# Altium PCB ПечатнаяПлата.PcbDoc
Units mm, origin at the board's own origin, x right, y up, seen from the top; angles counter-clockwise.
Board outline 100 x 80 mm, 2 copper layers (Top Layer, Bottom Layer); 87 components, 101 nets, 406 pads, 98 vias.
Unrouted connection lines stored in the file: 1.
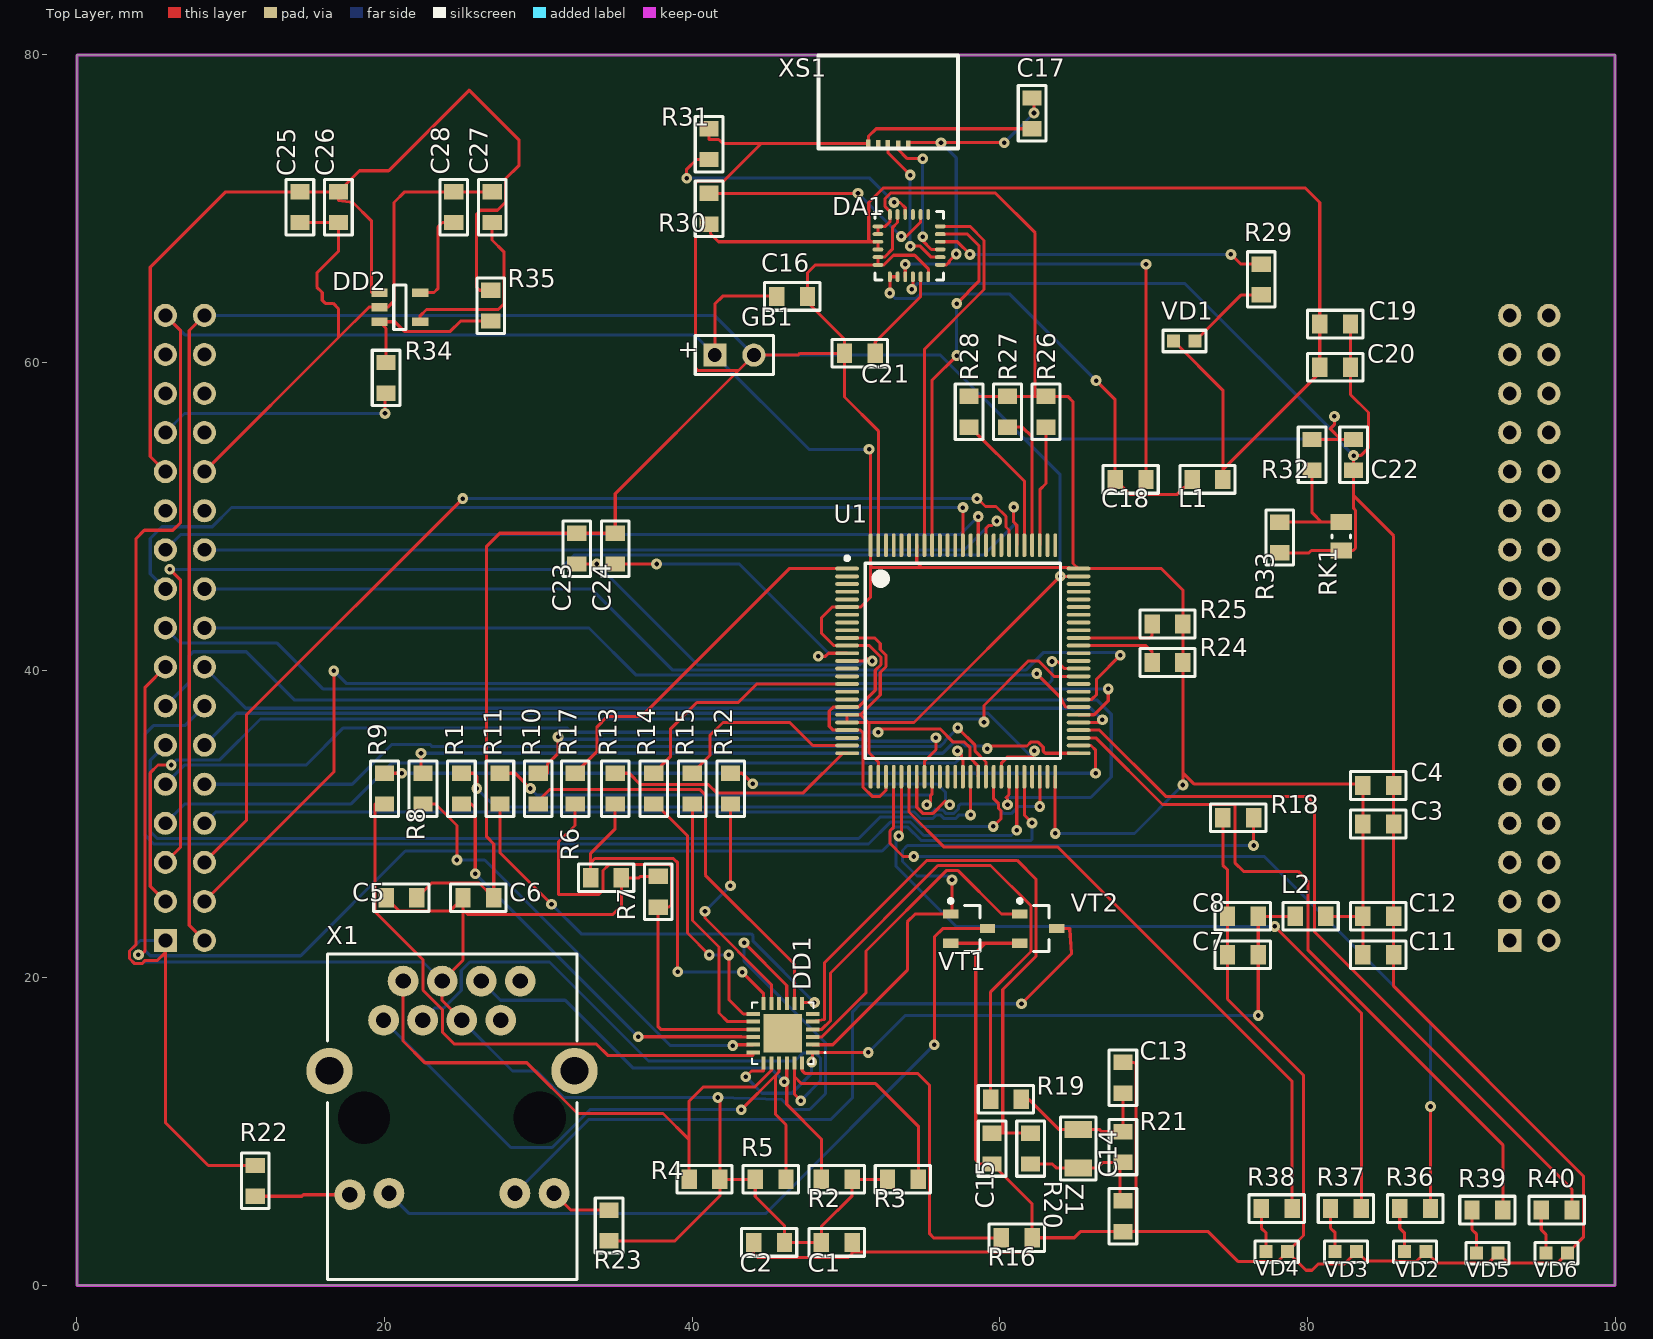
[diagram p0: Top Layer view]
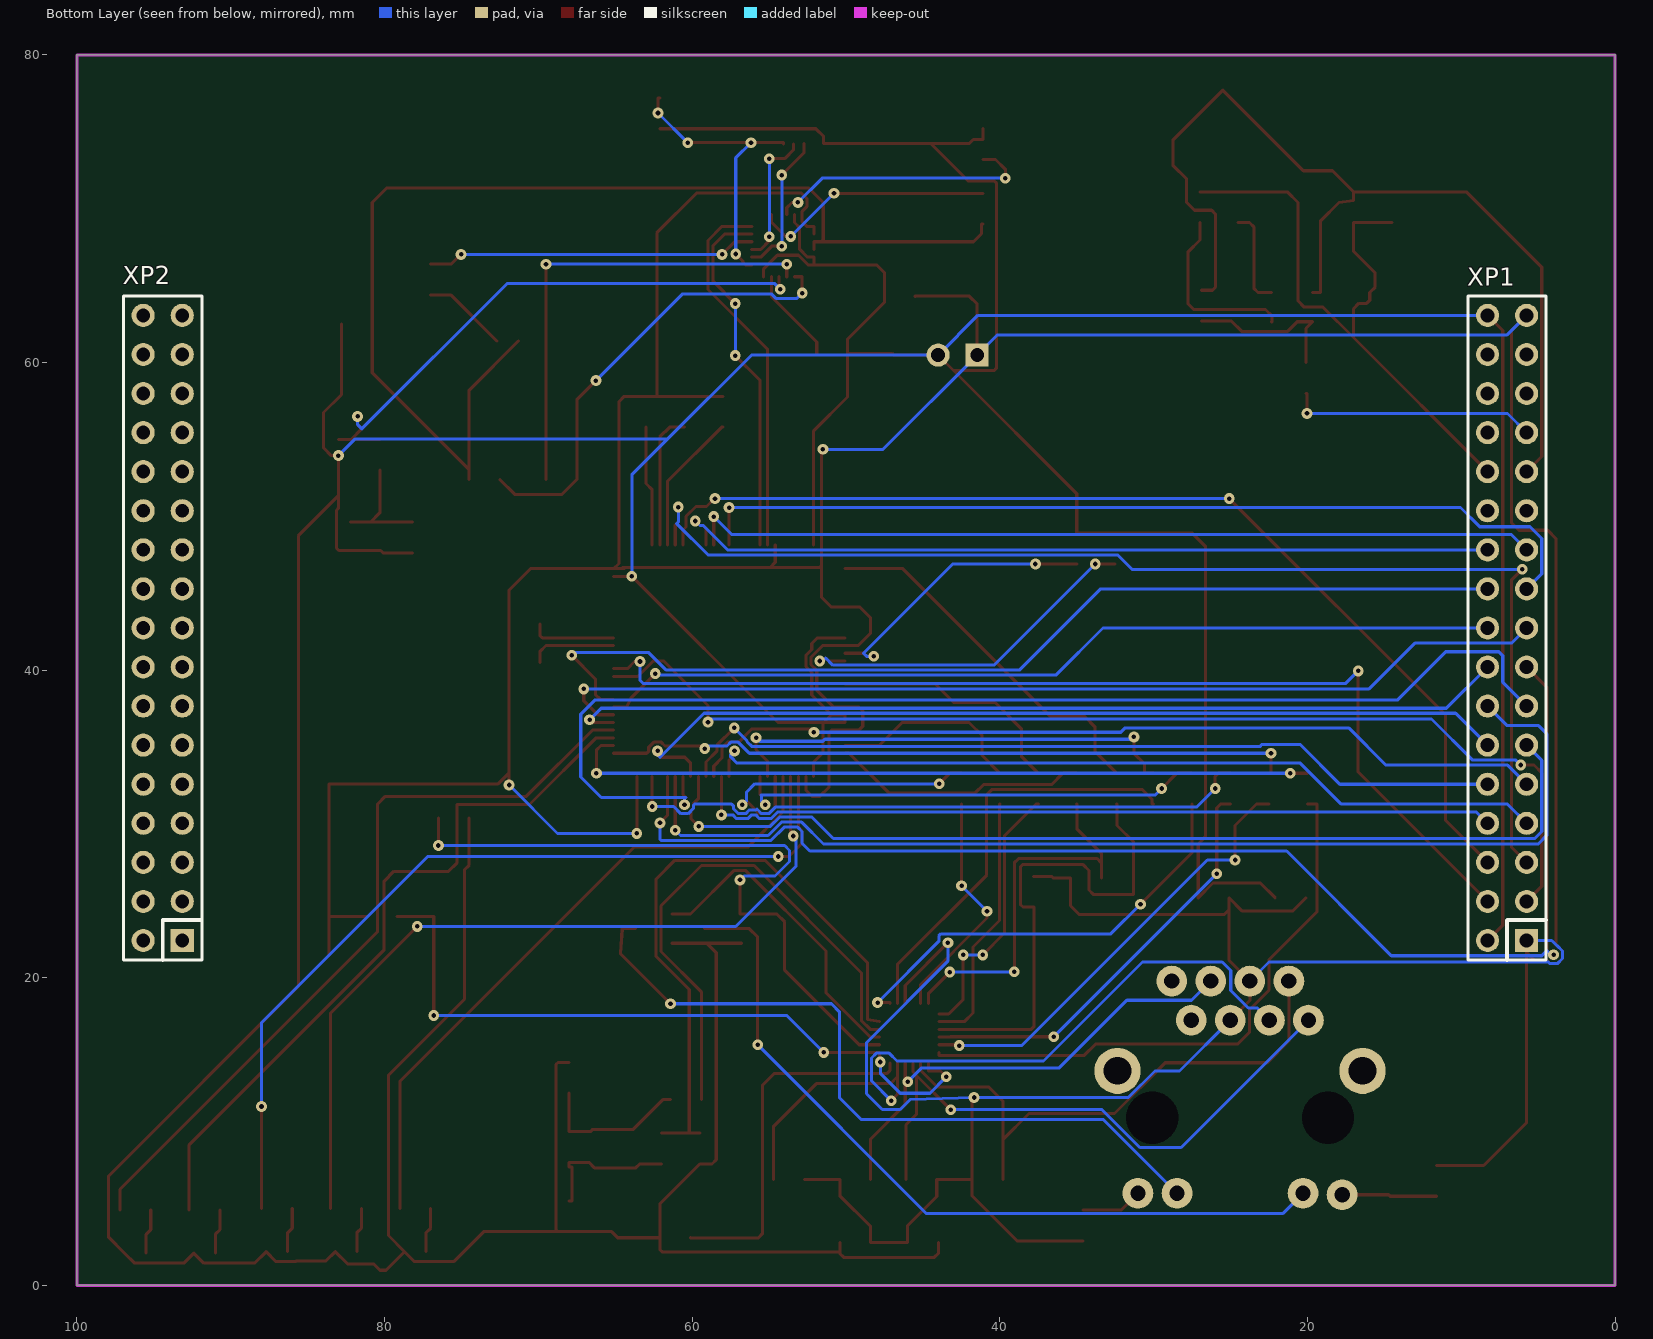
[diagram p1: Bottom Layer view, seen from below]

## Layer stack, top to bottom
Top Solder: solder mask 0.0102, Solder Resist, Dk 3.5
Top Layer: signal copper 0.0356
Dielectric 1: dielectric 0.32, FR-4, Dk 4.8
Bottom Layer: signal copper 0.0356
Bottom Solder: solder mask 0.0102, Solder Resist, Dk 3.5

## Board outline
0,0 100,0 100,80 0,80

## Design rules (kind name [scope] priority, off if disabled: settings)
Clearance [All] p1: gap=0.125
PolygonConnect [All] p1: connectstyle=Relief reliefconductorwidth=0.254 reliefentries=4 polygonreliefangle="90 Angle" airgapwidth=0.254
RoomDefinition Shcematic [InComponentClass('Shcematic')] p1: confinementstyle=ConfineIn formatcopy=TRUE lockcomponents=FALSE outline -72.5,-82.5 -21.7,-82.5 -21.7,-57.1 -72.5,-57.1
RoutingVias [All] p1: holewidth=0.3 width=0.7 viastyle="Through Hole" minholewidth=0.3 minwidth=0.6 maxholewidth=0.6 maxwidth=1.2
SolderMaskExpansion [All] p1: expansion=0.102
Width [All] p1: maxlimit=10 minlimit=0.125 preferedwidth=0.2
29 further rules are at their usual default settings.

## Components (designator, comment, footprint, x,y, rotation, side; value= is the part's Value field where it differs from the comment)
C1 "100 nF" CH0805C 49.4,2.8 r0 top
C2 "100 nF" CH0805C 45,2.8 r180 top
C3 "100 nF" CH0805C 84.6,30 r0 top
C4 "10 uF" CH0805C 84.6,32.5 r0 top
C5 "100 nF" CH0805C 21.1,25.2 r0 top
C6 "100 nF" CH0805C 26.1,25.2 r0 top
C7 "100 nF" CH0805C 75.8,21.5 r180 top
C8 "10 uF" CH0805C 75.8,24 r180 top
C11 "100 nF" CH0805C 84.6,21.5 r0 top
C12 "10 uF" CH0805C 84.6,24 r0 top
C13 "20 pF" CH0805C 68,13.5 r90 top
C14 "20 pF" CH0805C 68,4.5 r270 top
C15 "10 pF" CH0805C 59.5,8.9 r270 top
C16 "*" CH0805C 46.5,64.3 r0 top
C17 "*" CH0805C 62.1,76.2 r90 top
C18 "*" CH0805C 68.5,52.4 r0 top
C19 "*" CH0805C 81.8,62.5 r0 top
C20 "*" CH0805C 81.8,59.7 r0 top
C21 "*" CH0805C 50.9,60.6 r180 top
C22 "*" CH0805C 83,54 r270 top
C23 "" CH0805C 32.5,47.9 r90 top
C24 "" CH0805C 35,47.9 r90 top
C25 "*" CH0805C 14.5,70.1 r270 top
C26 "*" CH0805C 17,70.1 r270 top
C27 "*" CH0805C 27,70.1 r90 top
C28 "*" CH0805C 24.5,70.1 r90 top
DA1 "BQ24295" BQ24295 54.1,67.6 r180 top
DD1 "LAN8720" "*QFN50P400X400X100-25N - duplicate" 45.9,16.4 r180 top
DD2 "CAT6219" CAT6219 21,63.6 r0 top
GB1 "Battery" Battery 38.2,61.3 r0 top
L1 "Inductor" CH0805L 73.5,52.4 r0 top
L2 "190 mH" CH0805L 80.2,24 r180 top
R1 "22" CH0805R 25,32.3 r270 top
R2 "49.9" CH0805R 49.4,6.9 r0 top
R3 "49.9" CH0805R 53.7,6.9 r180 top
R4 "49.9" CH0805R 40.8,6.9 r0 top
R5 "49.9" CH0805R 45.1,6.9 r180 top
R6 "1.5 k" CH0805R 34.4,26.5 r0 top
R7 "10 k" CH0805R 37.8,25.6 r90 top
R8 "22" CH0805R 22.5,32.3 r270 top
R9 "22" CH0805R 20,32.3 r270 top
R10 "22" CH0805R 30,32.3 r270 top
R11 "22" CH0805R 27.5,32.3 r270 top
R12 "22" CH0805R 42.5,32.3 r270 top
R13 "22" CH0805R 35,32.3 r270 top
R14 "22" CH0805R 37.5,32.3 r270 top
R15 "22" CH0805R 40,32.3 r270 top
R16 "12.1 k" CH0805R 61.1,3.1 r180 top
R17 "22" CH0805R 32.4,32.3 r270 top
R18 "10 k" CH0805R 75.5,30.4 r0 top
R19 "22" CH0805R 60.4,12.1 r0 top
R20 "22" CH0805R 62,8.9 r90 top
R21 "1 M" CH0805R 68,9 r270 top
R22 "680" CH0805R 11.6,6.8 r90 top
R23 "680" CH0805R 34.6,3.9 r270 top
R24 "" CH0805R 70.9,40.5 r0 top
R25 "" CH0805R 70.9,43 r0 top
R26 "" CH0805R 63,56.8 r90 top
R27 "" CH0805R 60.5,56.8 r90 top
R28 "" CH0805R 58,56.8 r90 top
R29 "*" CH0805R 77,65.4 r270 top
R30 "*" CH0805R 41.1,70 r90 top
R31 "*" CH0805R 41.1,74.2 r270 top
R32 "*" CH0805R 80.3,54 r90 top
R33 "*" CH0805R 78.2,48.625 r90 top
R34 "*" CH0805R 20.1,59 r90 top
R35 "*" CH0805R 26.9,63.7 r270 top
R36 "65" CH0805R 87,5 r180 top
R37 "65" CH0805R 82.5,5 r180 top
R38 "65" CH0805R 78,5 r180 top
R39 "65" CH0805R 91.7,4.9 r180 top
R40 "65" CH0805R 96.2,4.9 r180 top
RK1 "Resistor_termo" "0805 (Resistor)" 82.2,48.7 r90 top
U1 "STM32F407VGT6" STM-LQFP100_L 57.6,40.6 r0 top
VD1 "*" CH0603LB 72,61.4 r180 top
VD2 "*" CH0603LB 87,2.2 r0 top
VD3 "*" CH0603LB 82.5,2.2 r0 top
VD4 "*" CH0603LB 78,2.2 r0 top
VD5 "*" CH0603LB 91.7,2.1 r0 top
VD6 "*" CH0603LB 96.2,2.1 r0 top
VT1 "*" SOT23_123 58,23.2 r0 top
VT2 "*" SOT23_123 62.5,23.2 r0 top
X1 "HR911105A" "CON: HR911105A" 30.1,10.9 r180 top
XP1 "Коннектор" Connector 12,42 r180 bottom
XP2 "Comment" Connector 99.4,42 r180 bottom
XS1 "USB" USB 42.5,72.3 r90 top
Z1 "25MHz" "OSC: 3215" 65.1,8.9 r270 top

## Footprints (in the part's own frame and the unit in brackets; to place one, negate y for a bottom-side part, rotate by r counter-clockwise, add the part's x,y. Pads: shape width x height; smd on the part's side, far side on the other; paste and mask are expansions set on the pad)
"0805 (Resistor)" [mm] "Chip Resistor, 2-Leads, Body 2,10x1,30mm, IPC Medium Density"
  rect 1.05x1.4 smd: 1(-0.925,0) 2(0.925,0)
  silkscreen extent -0.1,-0.6 0.1,0.6, body extent -0.97,-0.63 1.02,0.63, height 0.5
"*QFN50P400X400X100-25N - duplicate" [mm]
  rect 0.86x0.26 smd: 1(-1.935,1.25) 2(-1.935,0.75) 3(-1.935,0.25) 4(-1.935,-0.25) 5(-1.935,-0.75) 6(-1.935,-1.25) 13(1.935,-1.25) 14(1.935,-0.75) 15(1.935,-0.25) 16(1.935,0.25) 17(1.935,0.75) 18(1.935,1.25)
  rect 0.26x0.86 smd: 7(-1.25,-1.935) 8(-0.75,-1.935) 9(-0.25,-1.935) 10(0.25,-1.935) 11(0.75,-1.935) 12(1.25,-1.935) 19(1.25,1.935) 20(0.75,1.935) 21(0.25,1.935) 22(-0.25,1.935) 23(-0.75,1.935) 24(-1.25,1.935)
  rect 2.5x2.5 smd: 25(0,0)
  silkscreen extent -2.8,-2 2,2, body extent -2,-2 2,2, height 1.01
Battery [mm]
  rect 1.5x1.5 hole 0.9: 1(3.27,-0.818)
  round 1.5 hole 0.9: 2(5.81,-0.818)
  silkscreen extent 2,-2.09 7.08,0.45, body extent 2,-8.17 7.08,0.45, height 5.85
BQ24295 [mm] "QFN, 24-Leads, Body 4,00x4,00mm, Pitch 0,50mm, Thermal Pad 3,00x3,00mm, IPC Medium Density"
  oval 0.7x0.25 smd: 1(-2.025,1.25) 2(-2.025,0.75) 3(-2.025,0.25) 4(-2.025,-0.25) 5(-2.025,-0.75) 6(-2.025,-1.25) 13(2.025,-1.25) 14(2.025,-0.75) 15(2.025,-0.25) 16(2.025,0.25) 17(2.025,0.75) 18(2.025,1.25)
  oval 0.25x0.7 smd: 7(-1.25,-2.025) 8(-0.75,-2.025) 9(-0.25,-2.025) 10(0.25,-2.025) 11(0.75,-2.025) 12(1.25,-2.025) 19(1.25,2.025) 20(0.75,2.025) 21(0.25,2.025) 22(-0.25,2.025) 23(-0.75,2.025) 24(-1.25,2.025)
  silkscreen extent -2.23,-2.22 2.22,2.22, body extent -2.05,-2.05 2.05,2.05, height 1
CAT6219 [mm] "SOT23, 5-Leads, Body 2,90x2,80mm, Pitch 0,95mm, IPC Medium Density"
  rect 1.05x0.55 smd: 1(-1.325,0.95) 2(-1.325,0) 3(-1.325,-0.95) 4(1.325,-0.95) 5(1.325,0.95)
  silkscreen extent -0.4,-1.45 0.4,1.45, body extent -1.5,-1.5 1.5,1.5, height 1.3
CH0603LB [mm] "Chip Capacitor, 2-Leads, Body 1,53x0,85mm, IPC Medium Density"
  rect 0.85x0.85 smd: 1(-0.7,0) 2(0.7,0)
  silkscreen extent -1.4,-0.7 1.4,0.7, body extent -0.8,-0.4 0.8,0.4, height 0.6
CH0805C [mm] "Chip Capacitor, 2-Leads, Body 2,00x1,20mm, IPC Medium Density"
  rect 1x1.25 smd: 1(-1,0) 2(1,0)
  silkscreen extent -1.8,-0.9 1.8,0.9, body extent -1,-0.62 1,0.63, height 0.78
CH0805L [mm]
  rect 1x1.25 smd: 1(-1,0) 2(1,0)
  silkscreen extent -1.8,-0.9 1.8,0.9, body extent -1,-0.62 1,0.63, height 0.85
CH0805R [mm]
  rect 1x1.25 smd: 1(-1,0) 2(1,0)
  silkscreen extent -1.8,-0.9 1.8,0.9, body extent -1,-0.6 1,0.6, height 0.44
"CON: HR911105A" [mm]
  round 3 hole 1.8: 0(-2.25,-3.05) 0(13.68,-3.05)
  oval 0.7x0 hole 3.4: 0(0,0) 0(11.43,0)
  round 2 hole 1: 1(10.165,-6.35) 2(8.895,-8.89) 3(7.625,-6.35) 4(6.355,-8.89) 5(5.085,-6.35) 6(3.815,-8.89) 7(2.545,-6.35) 8(1.275,-8.89) 9(12.35,5) 10(9.81,4.9) 11(1.62,4.9) 12(-0.92,4.9)
  round 0.5 on Mech1: ""(13.1,-10)
  silkscreen extent -2.4,-10.65 13.8,10.5, body extent -2.24,-10.5 13.64,10.9, height 13.6
Connector [mm]
  rect 1.5x1.5 hole 0.9: 1(6.25,-19.575)
  round 1.5 hole 0.9: 2(3.71,-19.575) 3(6.25,-17.035) 4(3.71,-17.035) 5(6.25,-14.495) 6(3.71,-14.495) 7(6.25,-11.955) 8(3.71,-11.955) 9(6.25,-9.415) 10(3.71,-9.415) 11(6.25,-6.875) 12(3.71,-6.875) 13(6.25,-4.335) 14(3.71,-4.335) 15(6.25,-1.795) 16(3.71,-1.795) 17(6.25,0.745) 18(3.71,0.745) 19(6.25,3.285) 20(3.71,3.285) 21(6.25,5.825) 22(3.71,5.825) 23(6.25,8.365) 24(3.71,8.365) 25(6.25,10.905) 26(3.71,10.905) 27(6.25,13.445) 28(3.71,13.445) 29(6.25,15.985) 30(3.71,15.985) 31(6.25,18.525) 32(3.71,18.525) 33(6.25,21.065) 34(3.71,21.065)
  silkscreen extent 2.44,-20.85 7.52,22.33, body extent 2.48,-20.85 7.48,22.33, height 8.4
"OSC: 3215" [mm]
  rect 1.1x1.8 smd: 1(-1.25,0) 3(1.25,0)
  silkscreen extent -2.05,-1.15 2.05,1.15, body extent -1.61,-0.76 1.61,0.76, height 0.91
SOT23_123 [mm] "SOT23, 3-Leads, Body 3,0x2,6mm (max), Pitch 0,95mm, IPC Medium Density"
  rect 1x0.6 smd: 1(-1.2,0.95) 2(1.2,0) 3(-1.2,-0.95)
  round 0.5 on Mech1: ""(-0.9,1.1)
  silkscreen extent -1.32,-1.5 0.7,1.92, body extent -1.32,-1.52 1.32,1.52, height 1.12
STM-LQFP100_L [mm] "Thin QFP, 100-Leads, Body 14x14mm, Pitch 0.5mm, IPC High Density"
  oval 1.55x0.25 smd: 1(-7.525,6) 2(-7.525,5.5) 3(-7.525,5) 4(-7.525,4.5) 5(-7.525,4) 6(-7.525,3.5) 7(-7.525,3) 8(-7.525,2.5) 9(-7.525,2) 10(-7.525,1.5) 11(-7.525,1) 12(-7.525,0.5) 13(-7.525,0) 14(-7.525,-0.5) 15(-7.525,-1) 16(-7.525,-1.5) 17(-7.525,-2) 18(-7.525,-2.5) 19(-7.525,-3) 20(-7.525,-3.5) 21(-7.525,-4) 22(-7.525,-4.5) 23(-7.525,-5) 24(-7.525,-5.5) 25(-7.525,-6) 51(7.525,-6) 52(7.525,-5.5) 53(7.525,-5) 54(7.525,-4.5) 55(7.525,-4) 56(7.525,-3.5) 57(7.525,-3) 58(7.525,-2.5) 59(7.525,-2) 60(7.525,-1.5) 61(7.525,-1) 62(7.525,-0.5) 63(7.525,0) 64(7.525,0.5) 65(7.525,1) 66(7.525,1.5) 67(7.525,2) 68(7.525,2.5) 69(7.525,3) 70(7.525,3.5) 71(7.525,4) 72(7.525,4.5) 73(7.525,5) 74(7.525,5.5) 75(7.525,6)
  oval 0.25x1.55 smd: 26(-6,-7.525) 27(-5.5,-7.525) 28(-5,-7.525) 29(-4.5,-7.525) 30(-4,-7.525) 31(-3.5,-7.525) 32(-3,-7.525) 33(-2.5,-7.525) 34(-2,-7.525) 35(-1.5,-7.525) 36(-1,-7.525) 37(-0.5,-7.525) 38(0,-7.525) 39(0.5,-7.525) 40(1,-7.525) 41(1.5,-7.525) 42(2,-7.525) 43(2.5,-7.525) 44(3,-7.525) 45(3.5,-7.525) 46(4,-7.525) 47(4.5,-7.525) 48(5,-7.525) 49(5.5,-7.525) 50(6,-7.525) 76(6,7.525) 77(5.5,7.525) 78(5,7.525) 79(4.5,7.525) 80(4,7.525) 81(3.5,7.525) 82(3,7.525) 83(2.5,7.525) 84(2,7.525) 85(1.5,7.525) 86(1,7.525) 87(0.5,7.525) 88(0,7.525) 89(-0.5,7.525) 90(-1,7.525) 91(-1.5,7.525) 92(-2,7.525) 93(-2.5,7.525) 94(-3,7.525) 95(-3.5,7.525) 96(-4,7.525) 97(-4.5,7.525) 98(-5,7.525) 99(-5.5,7.525) 100(-6,7.525)
  silkscreen extent -7.65,-6.35 6.35,6.8, body extent -7,-7 7,7, height 1.6
USB [mm]
  rect 0.5x0.3 smd: 1(1.9,-11.55) 2(1.9,-10.9) 3(1.925,-10.225) 4(1.925,-9.6) 5(1.95,-8.95)
  silkscreen extent 1.62,-14.78 7.65,-5.7, body extent 1.75,-14.65 7.48,-5.85, height 2.71

## Part data
C1 C2 C3 C4 C5 C6 C7 C8 C11 C12 C13 C14 C15 C16 C17 C18 C19 C20 C21 C22 C23 C24 C25 C26 C27 C28: library part Capacitor
DA1: "PWR"
L2: library part Inductor
R1 R2 R3 R4 R5 R6 R7 R8 R9 R10 R11 R12 R13 R14 R15 R16 R17 R18 R19 R20 R21 R22 R23 R24 R25 R26 R27 R28 R29 R30 R31 R32 R33 R34 R35 R36 R37 R38 R39 R40: library part Resistor
U1: "ARM Cortex-M4 32-bit MCU+FPU, 210 DMIPS, 1024 kB Flash, 192 kB Internal RAM, 82 I/Os, 100-pin LQFP, -40 to 85 degC, Tray"
VD1 VD2 VD3 VD4 VD5 VD6: library part LED
VT1 VT2: library part N-chanel, "Mosfet"
X1: "Ethernet RJ-45"
XP1: library part Connector
Z1: library part Oscillator

## Via types
v1: diameter 0.7, hole 0.3, Top Layer to Bottom Layer, 98 vias

## Nets (pads, with @x,y where several pads share a name; then routed paths per layer and width w, separated by ;. In a path a pad name is that pad's centre, name@x,y a point inside that pad or via, vN(x,y) a via of type N, cw(c..) or ccw(c..) an arc to the next point about the centre after c; other vN are vias at no path point)
+3V3: C1.1 C2.1 C3.1 C4.1 C5.1 C6.1 C11.1 C12.1 C16.1 DA1.12 DA1.13 DA1.14 DD1.9 GB1.1 L2.1 R2.2 R3.2 R4.2 R5.2 R6.2 R7.2 R22.2 R23.2 R24.2 R25.2 R26.2 R27.2 R28.2 U1.6 U1.11 U1.19 U1.22 U1.28 U1.50 U1.75 U1.94 U1.100 X1.4 X1.5 XP1.1 XP1.33 | length 403.4
  Top Layer w0.2: XP1.1 5.75,21.64 ; XP1.33 6.748,62.067 6.748,49.605 6.24,49.097 4.386,49.097 3.852,48.564 3.852,22.166 3.425,21.738 3.425,21.262 3.762,20.925 4.238,20.925 4.445,21.132 5.242,21.132 5.75,21.64 ; R22.2 8.548,7.8 5.75,10.598 5.75,21.64 ; C5.1 20.968,24.332 24.232,24.332 C6.1 25.1,24.434 ; X1.5 23.745,18.52 X1.4 25.1,21.145 25.1,24.434 ; R23.2 38.884,2.9 41.8,5.816 R4.2 ; R7.2 36.642,26.6 36.542,26.5 R6.2 35.4,24.688 34.816,24.104 25.43,24.104 25.1,24.434 ; GB1.1 41.47,63.804 41.978,64.312 45.5,64.312 C16.1 ; v1(41.673,12.217) 41.8,12.09 R4.2 ; v1(43.375,22.275) 46.15,19.5 DD1.9 ; v1(51.503,54.355) 51.6,54.258 U1.100 51.6,46.786 ; DA1.14 DA1.13 52.562,68.85 52.85,69.138 DA1.12 52.85,69.826 52.545,70.131 52.545,70.662 52.891,71.008 59.716,71.008 62.298,68.427 62.298,57.8 ; U1.28 52.6,32.186 52.214,31.8 51.706,31.8 51.096,32.41 51.096,35.948 50.944,36.1 U1.22 49.166,36.1 48.912,36.354 48.912,37.346 49.166,37.6 U1.19 50.8,37.6 51.9,38.7 51.9,39.987 52.275,40.362 52.275,40.838 51.513,41.6 U1.11 49.199,41.6 48.404,42.395 48.404,43.411 49.093,44.1 U1.6 50.944,44.1 51.6,44.756 51.6,46.786 ; R3.2 R2.2 50.4,5.835 48.4,3.835 C1.1 C2.1 46,3.885 44.1,5.785 R5.2 R4.2 ; U1.94 54.6,47.008 54.929,46.679 ; R28.2 R27.2 62.298,57.8 ; v1(63.6,29.387) U1.50 ; v1(71.9,32.536) 71.9,33.324 ; L2.1 C12.1 ; C11.1 C12.1 ; 51.6,46.786 51.707,46.679 54.929,46.679 ; 54.929,46.679 64.371,46.679 ; 62.298,57.8 R26.2 64.416,57.8 64.762,57.454 64.762,46.93 U1.75@65.092,46.6 ; 64.371,46.679 64.515,46.679 U1.75@64.515,46.6 ; 64.371,46.679 64.45,46.6 U1.75@64.515,46.6 ; U1.75@64.515,46.6 U1.75@65.092,46.6 ; U1.75@65.092,46.6 U1.75 70.511,46.6 71.9,45.211 R25.2 R24.2 71.9,33.324 ; 71.9,33.324 72.611,32.613 83.6,32.613 C4.1 C3.1 C12.1
  Bottom Layer w0.2: XP1.1 4.129,22.425 3.779,22.075 3.762,22.075 3.425,21.738 3.425,21.262 3.762,20.925 4.238,20.925 4.344,21.03 22.505,21.03 X1.4 ; XP1.33 7.018,61.797 40.155,61.797 GB1.1 47.597,54.355 v1(51.503,54.355) ; X1.5 28.321,13.944 29.917,13.944 31.644,12.217 v1(41.673,12.217) 45.832,12.09 46.483,11.438 47.64,11.438 48.669,12.468 48.669,15.787 43.375,21.081 v1(43.375,22.275) ; v1(63.6,29.387) 68.751,29.387 v1(71.9,32.536)
BLCNT: R34.1 XP1.27 | length 16.2
  Top Layer w0.2: v1(20.032,56.692) 20.032,58 R34.1
  Bottom Layer w0.2: XP1.27 6.997,56.692 v1(20.032,56.692)
BLGND: C25.2 C26.2 C27.2 C28.2 DD2.2 XP1.26 | length 41.4
  Top Layer w0.2: XP1.26 17.01,61.625 ; C25.2 C26.2 17.01,69.1 17.01,67.231 15.6,65.822 15.6,64.903 15.952,64.551 15.952,64.048 16.154,63.846 16.657,63.846 17.01,63.493 17.01,61.625 ; C27.2 C28.2 21.308,71.1 20.616,70.408 20.616,64.006 20.21,63.6 DD2.2 18.985,63.6 17.01,61.625
BLVDD: C25.1 C26.1 DD2.1 R35.1 XP1.25 | length 64.6
  Top Layer w0.2: XP1.25 4.767,53.888 4.767,66.198 9.669,71.1 C25.1 C26.1 ; DD2.1 19.14,64.55 19.14,69.217 17.949,70.408 17,70.535 C26.1 ; R35.1 26.179,64.7 25.976,64.903 25.976,69.646 26.23,69.9 27.347,69.9 27.855,70.408 27.855,71.932 28.75,72.827 28.75,74.45 25.5,77.7 20.265,72.465 18.378,72.465 17.012,71.1 C26.1
GND: C1.2 C2.2 C3.2 C4.2 C5.2 C6.2 C7.2 C8.2 C11.2 C12.2 C13.2 C14.2 C15.2 C16.2 C17.1 C19.2 C20.2 C21.2 C22.2 C23.2 C24.2 DA1.11 DA1.17 DA1.18 DA1.24 DD1.25 GB1.2 R16.1 R18.1 R31.1 R33.1 RK1.1 U1.10 U1.20 U1.21 U1.27 U1.74 U1.99 VD2.2 VD3.2 VD4.2 VD5.2 VD6.2 VT1.3 VT2.3 XP1.2 XP1.34 XS1.5 | length 503.4
  Top Layer w0.2: XP1.2 7.307,23.408 7.307,62.082 XP1.34 ; C5.2 23.061,26.161 26.139,26.161 C6.2 27.1,28.701 26.636,29.165 26.636,48.056 27.48,48.9 C23.2 C24.2 35,51.472 43.014,59.486 ; R31.1 41.089,75.2 41.089,74.497 41.724,74.497 41.978,74.243 44.492,74.243 ; C2.2 44,2.082 44.254,1.828 50.146,1.828 50.4,2.082 C1.2@50.4,2.184 ; U1.10 51.857,42.1 52.225,41.732 52.225,41.348 52.6,40.973 52.6,40.227 52.225,39.852 52.225,38.381 50.948,37.104 ; C1.2 C1.2@50.4,2.184 ; U1.27 52.1,34.035 51.487,34.648 51.487,36.565 51.453,36.6 ; U1.99 52.1,55.559 49.9,57.759 C21.2 ; DA1.11 53.35,69.108 53.011,68.768 53.011,67.36 52.501,66.85 DA1.17 DA1.18 ; DA1.24 55.35,66.09 54.465,66.975 53.093,66.975 52.468,66.35 DA1.18 ; VT1.3 59.047,22.25 ; VT2.3 59.047,22.25 ; C17.1 51.96,75.2 51.45,74.69 XS1.5 51.45,74.243 44.492,74.243 ; C13.2 68.724,14.5 68.851,14.373 68.851,3.627 68.724,3.5 ; R18.1 74.5,27.325 74.8,27.025 C8.2 C7.2 74.8,18.612 79.748,13.664 79.748,3.248 VD4.2 ; R33.1 80.103,47.625 80.253,47.775 RK1.1 82.972,47.775 83.126,47.929 83.126,50.393 82.999,50.52 82.999,51.333 ; C19.2 C20.2 82.8,57.911 83.964,56.747 83.964,54.457 83.456,53.949 v1(82.999,53.949) ; C22.2 82.999,51.333 ; v1(82.999,53.949) v1(82.999,53.949) ; C22.2 v1(82.999,53.949) ; 43.014,59.486 40.361,59.486 40.225,59.622 40.225,71.678 40.352,71.805 42.054,71.805 44.492,74.243 ; 43.014,59.486 GB1.2 46.88,60.482 46.998,60.6 C21.2 ; C21.2 49.9,61.518 47.5,63.918 C16.2 47.5,65.836 48.014,66.35 DA1.18 ; U1.20 50.948,37.104 ; U1.20 50.944,37.1 50.948,37.104 ; U1.20 U1.21 51.453,36.6 ; C1.2@50.4,2.184 61.948,2.184 62.1,2.336 R16.1 ; 50.948,37.104 51.453,36.6 ; 51.453,36.6 54.423,36.6 v1(63.923,46.1) ; 59.047,22.25 58.434,21.64 58.434,8.178 58.712,7.9 C15.2 62.1,5.3 R16.1 ; R16.1 64.838,3.1 65.238,3.5 C14.2 68.724,3.5 ; v1(63.923,46.1) U1.74 v1(63.923,46.1) ; 68.724,3.5 73.554,3.5 75.506,1.549 78.049,1.549 VD4.2 ; VD4.2 79.91,0.99 80.29,0.99 80.7,1.4 82.4,1.4 VD3.2 83.8,1.6 85.732,1.6 85.782,1.55 87.05,1.55 VD2.2 88.453,1.447 91.747,1.447 VD5.2 93.053,1.447 96.247,1.447 VD6.2 97.934,3.134 97.934,7.122 85.6,19.456 C11.2 C12.2 85.6,26.999 C3.2 C4.2 85.6,48.731 82.999,51.333
  Bottom Layer w0.2: XP1.34 41.427,63.065 GB1.2 56.146,60.482 61.612,55.016 ; v1(63.923,46.1) 63.923,52.704 61.612,55.016 ; v1(82.999,53.949) 81.932,55.016 61.612,55.016
NetC7_1: C7.1 C8.1 DD1.1 DD1.19 L2.2 | length 47.3
  Top Layer w0.2: v1(43.476,13.563) 43.857,13.944 44.65,13.944 DD1.19 ; v1(47.769,14.528) 47.835,14.594 DD1.1 v1(51.452,15.15) ; v1(76.8,17.551) C7.1 C8.1 L2.2
  Bottom Layer w0.2: v1(43.476,13.563) 44.543,12.496 46.474,12.496 47.769,13.791 v1(47.769,14.528) ; v1(51.452,15.15) 53.853,17.551 v1(76.8,17.551)
NetC13_1: C13.1 R19.2 R21.1 Z1.1 | length 10
  Top Layer w0.2: R19.2 61.872,12.1 63.822,10.15 Z1.1 66.463,10.15 66.613,10 R21.1 C13.1
NetC14_1: C14.1 R20.1 R21.2 Z1.3 | length 9.1
  Top Layer w0.2: R20.1 63.415,7.9 63.666,7.65 Z1.3 66.362,7.65 66.712,8 R21.2 68,7.69 67.8,7.69 67.8,5.5 C14.1
NetC15_1: C15.1 DD1.5 R20.2 | length 41.4
  Top Layer w0.2: DD1.5 48.591,17.305 48.591,20.963 55.262,27.634 61.129,27.634 62.35,26.414 62.35,21.4 60.19,19.24 60.19,9.9 ; C15.1 60.19,9.9 ; R20.2 60.19,9.9
NetC17_2: C17.2 DA1.1 XS1.1 | length 19.2
  Top Layer w0.2: XS1.1 54.05,74.294 v1(56.176,74.294) v1(60.291,74.294) ; DA1.1 56.532,66.35 56.71,66.528 56.71,66.598 v1(57.167,67.055) ; C17.2 62.222,77.2 v1(62.222,76.225)
  Bottom Layer w0.2: v1(56.176,74.294) 57.167,73.304 v1(57.167,67.055) ; v1(60.291,74.294) v1(62.222,76.225)
NetC18_1: C18.1 DA1.19 DA1.20 L1.1 | length 30.3
  Top Layer w0.2: v1(52.85,64.514) DA1.19 DA1.20 ; v1(66.26,58.826) 67.5,57.586 C18.1 68.466,51.434 71.534,51.434 L1.1
  Bottom Layer w0.2: v1(52.85,64.514) 53.189,64.175 54.561,64.175 54.85,64.464 60.621,64.464 v1(66.26,58.826)
NetC18_2: C18.2 DA1.21 | length 30.5
  Top Layer w0.2: DA1.21 v1(53.85,66.395) ; C18.2 v1(69.5,66.395)
  Bottom Layer w0.2: v1(53.85,66.395) v1(69.5,66.395)
NetC19_1: C19.1 C20.1 DA1.15 DA1.16 L1.2 R30.1 VD1.2 | length 75.3
  Top Layer w0.2: R30.1 41.19,69 41.19,68.376 41.716,67.85 51.622,67.85 ; DA1.16 DA1.15 51.622,67.85 ; VD1.2 74.5,58.2 74.5,53.034 ; L1.2 74.5,53.034 ; 51.622,67.85 51.477,67.995 51.477,70.408 52.419,71.35 79.858,71.35 80.8,70.408 C19.1 C20.1 80.8,59.334 74.5,53.034
NetC21_1: C21.1 DA1.23 | length 6.2
  Top Layer w0.2: C21.1 51.9,61.338 54.85,64.288 DA1.23
NetC22_1: C22.1 DA1.22 R32.2 | length 37.6
  Top Layer w0.2: v1(54.271,64.769) 54.35,64.848 DA1.22 ; R32.2 82.161,55 ; v1(81.75,56.5) 81.75,55.961 81.475,55.686 82.161,55 ; C22.1 82.161,55
  Bottom Layer w0.2: v1(54.271,64.769) 54.627,65.125 72.036,65.125 81.475,55.686 81.75,55.961 v1(81.75,56.5)
NetC23_1: C23.1 U1.13 | length 24
  Top Layer w0.2: C23.1 v1(33.799,46.9) ; U1.13 51.133,40.6 51.325,40.792 51.517,40.6 v1(51.7,40.6)
  Bottom Layer w0.2: v1(33.799,46.9) 40.374,40.325 50.858,40.325 51.325,40.792 51.517,40.6 v1(51.7,40.6)
NetC24_1: C24.1 U1.12 | length 19
  Top Layer w0.2: C24.1 v1(37.685,46.9) ; v1(48.2,40.9) 48.661,40.9 48.861,41.1 U1.12
  Bottom Layer w0.2: v1(37.685,46.9) 43.061,46.9 48.861,41.1 48.661,40.9 v1(48.2,40.9)
NetC27_1: C27.1 DD2.4 | length 11.8
  Top Layer w0.2: DD2.4 22.318,62.65 22.318,63.042 22.725,63.448 27.398,63.448 27.754,63.804 27.754,67.208 26.992,67.97 26.992,69.1 C27.1
NetC28_1: C28.1 DD2.5 | length 6.4
  Top Layer w0.2: DD2.5 23.217,64.55 23.487,64.82 23.487,68.821 23.766,69.1 C28.1
NetDA1_2: DA1.2 XS1.3 | length 9.5
  Top Layer w0.2: XS1.3 52.725,73.631 v1(54.17,72.186) ; v1(54.17,67.563) 54.83,67.563 55.543,66.85 DA1.2
  Bottom Layer w0.2: v1(54.17,67.563) v1(54.17,72.186)
NetDA1_3: DA1.3 XS1.2 | length 8.9
  Top Layer w0.2: XS1.2 53.4,73.845 53.992,73.253 v1(54.983,73.253) ; v1(54.983,68.173) 54.983,67.919 55.551,67.35 DA1.3
  Bottom Layer w0.2: v1(54.983,68.173) v1(54.983,73.253)
NetDA1_4: DA1.4 R29.1 | length 21.5
  Top Layer w0.2: DA1.4 57.236,67.85 v1(58.056,67.03) ; v1(75.023,67.03) 75.653,66.4 R29.1
  Bottom Layer w0.2: v1(58.056,67.03) v1(75.023,67.03)
NetDA1_8: DA1.8 R30.2 | length 15.8
  Top Layer w0.2: R30.2 v1(50.784,71) ; v1(53.586,68.198) 53.916,68.198 54.85,69.132 DA1.8
  Bottom Layer w0.2: v1(50.784,71) v1(53.586,68.198)
NetDA1_10: DA1.10 R31.2 | length 17.7
  Top Layer w0.2: v1(39.641,71.983) 39.641,72.565 40.276,73.2 R31.2 ; v1(53.128,70.408) 53.509,70.408 53.85,70.067 DA1.10
  Bottom Layer w0.2: v1(39.641,71.983) 51.554,71.983 v1(53.128,70.408)
NetDD1_2: DD1.2 R18.2 VT1.1 | length 45.8
  Top Layer w0.2: DD1.2 49.141,15.65 53.992,20.501 53.992,23.642 54.5,24.15 VT1.1 56.888,24.15 v1(56.888,26.364) ; v1(76.5,28.6) R18.2
  Bottom Layer w0.2: v1(56.888,26.364) 56.634,26.618 54.62,26.618 53.671,27.567 53.671,28.279 53.992,28.6 v1(76.5,28.6)
NetDD1_3: DD1.3 VT2.1 | length 20.7
  Top Layer w0.2: DD1.3 48.429,16.15 51.3,19.02 51.3,21.746 56.517,26.964 57.294,26.964 60.108,24.15 VT2.1
NetDD1_4: DD1.4 R19.1 | length 35.2
  Top Layer w0.2: DD1.4 48.432,16.65 48.988,17.206 48.988,20.319 55.973,27.304 59.396,27.304 62.025,24.675 62.025,21.716 59.4,19.091 R19.1
NetDD1_7: DD1.7 R11.2 | length 28.7
  Top Layer w0.2: R11.2 27.5,28.142 v1(30.853,24.79) ; DD1.7 47.15,18.389 v1(47.947,18.389)
  Bottom Layer w0.2: v1(30.853,24.79) 32.783,22.859 43.832,22.859 43.963,22.728 43.963,22.373 v1(47.947,18.389)
NetDD1_8: DD1.8 R10.2 | length 27.5
  Top Layer w0.2: R10.2 30.116,31.3 30.116,31.622 30.726,32.232 40.53,32.232 40.86,31.902 40.86,26.674 46.65,20.885 DD1.8
NetDD1_11: DD1.11 R12.2 | length 15.5
  Top Layer w0.2: v1(40.835,24.332) 40.835,23.885 45.15,19.57 DD1.11 ; v1(42.486,25.983) 42.486,31.3 R12.2
  Bottom Layer w0.2: v1(40.835,24.332) v1(42.486,25.983)
NetDD1_12: DD1.12 R6.1 R13.2 | length 25.3
  Top Layer w0.2: R6.1 33.4,27.489 ; R13.2 34.993,31.3 34.993,29.684 33.4,28.092 33.4,27.489 ; v1(39.057,20.395) 39.057,27.482 38.777,27.761 33.672,27.761 33.4,27.489 ; v1(43.248,20.37) 44.65,18.968 DD1.12
  Bottom Layer w0.2: v1(39.057,20.395) 39.082,20.37 v1(43.248,20.37)
NetDD1_13: DD1.13 R14.2 | length 17.5
  Top Layer w0.2: R14.2 37.634,31.3 39.692,29.243 39.692,22.91 v1(41.114,21.488) ; v1(42.384,21.488) 42.384,18.59 43.324,17.65 DD1.13
  Bottom Layer w0.2: v1(41.114,21.488) v1(42.384,21.488)
NetDD1_14: DD1.14 R15.2 | length 16.8
  Top Layer w0.2: R15.2 40.022,31.3 40.022,23.723 41.743,22.001 41.743,17.715 42.308,17.15 DD1.14
NetDD1_15: DD1.15 R7.1 R17.2 | length 32.7
  Top Layer w0.2: R17.2 32.377,31.3 32.377,29.901 31.3,28.824 31.3,25.425 33.926,25.425 34.205,25.704 34.205,26.974 34.586,27.355 38.523,27.355 38.65,27.228 38.65,24.752 38.498,24.6 R7.1 37.787,24.6 37.787,16.814 37.951,16.65 DD1.15
NetDD1_16: DD1.16 R1.2 | length 27.7
  Top Layer w0.2: R1.2 25.638,31.3 25.9,31.038 v1(25.9,26.771) ; v1(36.501,16.17) 43.213,16.17 43.233,16.15 DD1.16
  Bottom Layer w0.2: v1(25.9,26.771) v1(36.501,16.17)
NetDD1_17: DD1.17 R8.2 | length 29.3
  Top Layer w0.2: R8.2 23.309,31.3 24.706,29.903 v1(24.706,27.66) ; v1(42.638,15.595) 42.693,15.65 DD1.17
  Bottom Layer w0.2: v1(24.706,27.66) 26.509,27.66 38.574,15.595 v1(42.638,15.595)
NetDD1_18: DD1.18 R9.2 | length 38.3
  Top Layer w0.2: R9.2 19.372,31.3 19.372,24.307 22.496,21.183 22.496,19.202 23.766,17.932 23.766,16.458 24.528,15.696 33.774,15.696 34.51,14.96 43.959,14.96 43.959,15.15 DD1.18
NetDD1_20: DD1.20 R4.1 X1.2 | length 36.9
  Top Layer w0.2: X1.2 21.205,15.895 22.623,14.477 29.245,14.477 32.547,11.175 38.098,11.175 39.8,9.473 ; R4.1 39.8,9.473 ; DD1.20 45.15,13.98 44.072,12.902 40.714,12.902 39.8,11.988 39.8,9.473
NetDD1_21: DD1.21 R5.1 X1.1 | length 38.8
  Top Layer w0.2: v1(43.19,11.429) 45.416,13.655 ; DD1.21 45.65,13.889 45.416,13.655 ; R5.1 46.1,10.439 45.416,11.123 45.416,13.655
  Bottom Layer w0.2: X1.1 28.21,8.975 30.897,8.975 33.352,11.429 v1(43.19,11.429)
NetDD1_22: DD1.22 R2.1 X1.6 | length 31.1
  Top Layer w0.2: v1(45.991,13.239) v1@46.15,13.398 ; DD1.22 v1@46.15,13.398 ; R2.1 48.4,9.521 46.15,11.771 v1@46.15,13.398
  Bottom Layer w0.2: X1.6 27.534,18.541 31.742,18.541 36.132,14.151 45.079,14.151 v1(45.991,13.239)
NetDD1_23: DD1.23 R3.1 X1.3 | length 50
  Top Layer w0.2: DD1.23 46.65,13.582 ; v1(47.058,12.013) 46.65,12.421 46.65,13.582 ; R3.1 54.7,10.351 51.931,13.12 47.112,13.12 46.65,13.582
  Bottom Layer w0.2: X1.3 23.258,18.033 23.842,18.033 24.985,19.176 24.985,20.472 25.544,21.03 30.726,21.03 37.161,14.595 46.686,14.595 47.194,15.103 48.023,15.103 48.344,14.782 48.344,13.3 v1(47.058,12.013)
NetDD1_24: DD1.24 R16.2 | length 23.6
  Top Layer w0.2: DD1.24 47.15,13.969 47.328,13.791 54.652,13.791 55.44,13.004 55.44,3.352 55.694,3.098 60.1,3.098 R16.2
NetDD2_3: DD2.3 R34.2 R35.2 | length 10.6
  Top Layer w0.2: R34.2 20.1,62.225 DD2.3 20.667,62.65 21.291,62.026 24.274,62.026 24.948,62.7 R35.2
NetR22_1: R22.1 X1.9 | length 6.2
  Top Layer w0.2: R22.1 14.622,5.8 14.722,5.9 X1.9
NetR23_1: R23.1 X1.12 | length 4
  Top Layer w0.2: X1.12 32.12,4.9 R23.1
NetR29_2: R29.2 VD1.1 | length 5.5
  Top Layer w0.2: VD1.1 75.7,64.4 R29.2
NetR32_1: R32.1 R33.2 RK1.2 | length 7.6
  Top Layer w0.2: R33.2 80.916,49.625 ; R32.1 80.306,53 80.306,50.235 80.916,49.625 ; RK1.2 80.916,49.625
NetR36_2: R36.2 VD2.1 | length 2.9
  Top Layer w0.2: R36.2 86,3.728 86.3,3.428 VD2.1
NetR37_2: R37.2 VD3.1 | length 2.9
  Top Layer w0.2: R37.2 81.5,3.728 81.8,3.428 VD3.1
NetR38_2: R38.2 VD4.1 | length 2.9
  Top Layer w0.2: R38.2 77,3.728 77.3,3.428 VD4.1
NetR39_2: R39.2 VD5.1 | length 2.9
  Top Layer w0.2: R39.2 90.7,3.627 91,3.327 VD5.1
NetR40_2: R40.2 VD6.1 | length 2.9
  Top Layer w0.2: R40.2 95.2,3.627 95.5,3.327 VD6.1
NetVT1_2: VT1.2 X1.10 | length 51.2
  Top Layer w0.2: v1(55.745,15.646) 55.745,22.656 56.289,23.2 VT1.2
  Bottom Layer w0.2: X1.10 21.617,4.673 44.772,4.673 v1(55.745,15.646)
NetVT2_2: VT2.2 X1.11 | length 48.4
  Top Layer w0.2: v1(61.409,18.313) 64.66,21.564 64.548,23.2 VT2.2
  Bottom Layer w0.2: X1.11 33.274,10.794 49.014,10.794 50.436,12.217 50.436,17.805 50.944,18.313 v1(61.409,18.313)
PA1: R15.1 U1.24 | length 12.8
  Top Layer w0.2: R15.1 39.997,33.3 41.148,34.452 41.148,35.748 42,36.6 46.343,36.6 47.843,35.1 U1.24
PA2: R13.1 U1.25 | length 16.7
  Top Layer w0.2: R13.1 35.906,33.3 36.644,32.562 41.063,32.562 41.597,32.029 47.23,32.029 49.801,34.6 U1.25
PA4: R36.1 U1.29 | length 56.5
  Top Layer w0.2: U1.29 53.1,29.795 52.858,29.553 52.858,28.74 53.71,27.888 v1(54.398,27.888) ; R36.1 v1(88,11.632)
  Bottom Layer w0.2: v1(54.398,27.888) 77.19,27.888 88,17.079 v1(88,11.632)
PA5: R37.1 U1.30 | length 52.9
  Top Layer w0.2: v1(53.433,29.22) 53.6,29.387 U1.30 ; v1(77.868,23.342) 83.5,17.71 R37.1
  Bottom Layer w0.2: v1(53.433,29.22) 53.244,29.031 53.244,27.271 57.174,23.342 v1(77.868,23.342)
PA6: R38.1 U1.31 | length 42.7
  Top Layer w0.2: U1.31 54.1,30.784 56.386,28.498 63.785,28.498 79,13.283 R38.1
PA7: R12.1 U1.32 | length 20.2
  Top Layer w0.2: R12.1 43.246,33.3 v1(43.934,32.613) ; U1.32 54.6,31.087 55.012,30.675 55.636,30.675 56.456,31.495 56.701,31.25 v1(56.75,31.25)
  Bottom Layer w0.2: v1(43.934,32.613) 55.922,32.613 56.456,32.079 56.456,31.495 56.701,31.25 v1(56.75,31.25)
PB6: DA1.5 U1.92 | length 23.6
  Top Layer w0.2: U1.92 55.6,58.859 v1(57.192,60.451) ; DA1.5 57.904,68.35 58.64,67.614 58.64,65.277 v1(57.192,63.829)
  Bottom Layer w0.2: v1(57.192,60.451) v1(57.192,63.829)
PB7: DA1.6 U1.93 | length 24.6
  Top Layer w0.2: U1.93 55.1,60.873 58.97,64.744 58.97,67.936 58.056,68.85 DA1.6
PB10: U1.47
PB11: R1.1 U1.48 | length 42.3
  Top Layer w0.2: R1.1 25.798,33.3 26.001,33.097 v1(26.001,32.308) ; v1(62.6,31.138) U1.48
  Bottom Layer w0.2: v1(26.001,32.308) 27.214,31.095 54.592,31.095 55.012,30.675 55.488,30.675 55.785,30.972 55.84,30.917 56.27,30.917 56.512,30.675 56.988,30.675 57.325,31.012 57.325,31.186 57.431,31.292 59.843,31.292 59.925,31.21 59.925,31.012 60.262,30.675 60.738,30.675 61.201,31.138 v1(62.6,31.138)
PB12: R8.1 U1.51 | length 45.3
  Top Layer w0.2: v1(22.369,34.6) 22.369,33.3 R8.1 ; v1(59.184,34.9) 59.359,35.075 61.762,35.075 62.012,35.325 62.488,35.325 62.825,34.988 62.825,34.738 62.963,34.6 U1.51
  Bottom Layer w0.2: v1(22.369,34.6) 56.287,34.6 57.012,35.325 57.488,35.325 57.738,35.075 59.009,35.075 v1(59.184,34.9)
PB13: R9.1 U1.52 | length 49
  Top Layer w0.2: R9.1 v1(21.124,33.3) ; U1.52 65.93,35.1 66.229,34.801 v1(66.229,33.3)
  Bottom Layer w0.2: v1(21.124,33.3) v1(66.229,33.3)
PB14: R39.1 U1.53 | length 47.6
  Top Layer w0.2: U1.53 66.245,35.6 70.578,31.267 75.303,31.267 75.303,27.457 75.836,26.923 79.392,26.923 80.027,26.288 80.027,21.816 92.7,9.143 R39.1
PB15: R40.1 U1.54 | length 50.7
  Top Layer w0.2: U1.54 66.481,36.1 70.781,31.8 79.951,31.8 80.459,31.292 80.459,22.989 97.2,6.248 R40.1
PC1: R14.1 U1.16 | length 16
  Top Layer w0.2: R14.1 38.6,34.4 38.6,36.2 40.3,37.9 42.998,37.9 44.198,39.1 U1.16
PC3: U1.18
PC4: R10.1 U1.33 | length 30.9
  Top Layer w0.2: R10.1 30.599,33.3 30.599,33.914 31.284,34.6 v1(31.284,35.661) ; U1.33 55.1,34.086 55.846,34.832 v1(55.846,35.61)
  Bottom Layer w0.2: v1(31.284,35.661) 31.284,35.508 51.376,35.508 51.503,35.381 55.618,35.381 v1(55.846,35.61)
PC5: R11.1 U1.34 | length 31.3
  Top Layer w0.2: R11.1 28.489,33.3 v1(29.481,32.308) ; v1(55.25,31.25) 55.5,31.5 55.5,31.86 55.6,31.96 U1.34
  Bottom Layer w0.2: v1(29.481,32.308) 29.913,31.876 55.516,31.876 55.5,31.86 55.5,31.5 v1(55.25,31.25)
PC8: R24.1 U1.65 | length 5.6
  Top Layer w0.2: U1.65 69.498,41.6 69.9,41.198 R24.1
PC9: R25.1 U1.66 | length 5.6
  Top Layer w0.2: U1.66 69.74,42.1 69.9,42.26 R25.1
PC10: R26.1 U1.78 | length 7.8
  Top Layer w0.2: U1.78 62.6,51.739 63,52.139 R26.1
PC11: R27.1 U1.79 | length 8.9
  Top Layer w0.2: R27.1 61.468,55.8 62.1,55.168 U1.79
PC12: R28.1 U1.80 | length 9.2
  Top Layer w0.2: R28.1 58.081,55.8 61.6,52.281 U1.80
PD0: U1.81 XP1.5 | length 79.6
  Top Layer w0.2: XP1.5 6.748,28.503 6.748,45.846 v1(6.037,46.557) ; v1(60.9,50.6) 60.9,49.632 61.1,49.432 U1.81
  Bottom Layer w0.2: v1(6.037,46.557) 31.411,46.557 32.351,47.497 58.97,47.497 61.002,49.529 60.9,49.632 v1(60.9,50.6)
PD1: U1.82 XP1.6 | length 68.4
  Top Layer w0.2: XP1.6 11.015,30.23 11.015,37.083 v1(25.087,51.155) ; v1(58.517,51.155) 58.558,51.155 59.069,50.644 59.756,50.644 60.4,50 60.4,49.313 60.6,49.113 U1.82
  Bottom Layer w0.2: v1(25.087,51.155) v1(58.517,51.155)
PD2: U1.83
PD4: U1.85 XP1.22 | length 53.4
  Top Layer w0.2: U1.85 59.1,49.227 59.273,49.4 59.5,49.4
  Bottom Layer w0.2: XP1.22 57.698,47.825 59.273,49.4 59.5,49.4
  other v1: 59.8,49.7
PD5: U1.86 XP1.21 | length 55.6
  Top Layer w0.2: U1.86 v1(58.6,49.986)
  Bottom Layer w0.2: XP1.21 6.743,48.818 57.432,48.818 v1(58.6,49.986)
PD7: U1.88 XP1.19 | length 59.8
  Top Layer w0.2: U1.88 v1(57.6,50.571)
  Bottom Layer w0.2: XP1.19 4.767,46.268 4.767,48.564 5.529,49.326 8.805,49.326 10.05,50.571 v1(57.6,50.571)
PD8: U1.55 XP1.16 | length 61.4
  Top Layer w0.2: U1.55 66.488,36.6 v1(66.667,36.778)
  Bottom Layer w0.2: XP1.16 10.969,37.526 65.919,37.526 v1(66.667,36.778)
PD9: U1.56 XP1.17 | length 66
  Top Layer w0.2: U1.56 66.133,37.1 67.048,38.014 v1(67.048,38.785)
  Bottom Layer w0.2: XP1.17 6.738,41.757 13.022,41.757 15.994,38.785 v1(67.048,38.785)
PD10: U1.57 XP1.18 | length 59.2
  Top Layer w0.2: v1(62.399,39.776) 63.965,38.21 64.261,37.6 U1.57
  Bottom Layer w0.2: XP1.18 33.293,42.745 36.363,39.675 62.299,39.675 v1(62.399,39.776)
PD11: U1.58 XP1.20 | length 66.8
  Top Layer w0.2: U1.58 65.982,38.1 66.286,38.404 66.286,39.42 v1(67.835,40.969)
  Bottom Layer w0.2: XP1.20 33.446,45.285 38.731,40 61.679,40 62.819,41.14 67.665,41.14 v1(67.835,40.969)
PD14: U1.61 XP1.3 | length 73.4
  Top Layer w0.2: XP1.3 4.767,25.948 4.767,33.324 5.275,33.832 v1(6.138,33.832) ; v1(58.97,36.626) 58.97,37.709 61.866,40.605 62.519,40.605 63.524,39.6 U1.61
  Bottom Layer w0.2: v1(6.138,33.832) 6.456,34.15 9.263,34.15 11.942,36.829 58.767,36.829 v1(58.97,36.626)
PD15: U1.62 XP1.4 | length 68.7
  Top Layer w0.2: XP1.4 16.705,33.38 v1(16.705,39.953) ; v1(63.39,40.563) 63.746,40.563 64.209,40.1 U1.62
  Bottom Layer w0.2: v1(16.705,39.953) 17.535,39.123 63.169,39.123 63.39,39.344 v1(63.39,40.563)
PE1: XP1.23
PE2: R17.1 U1.1 | length 24.1
  Top Layer w0.2: R17.1 33.8,34.7 33.8,36.3 34.5,37 36.712,37 46.312,46.6 U1.1
PE5: DA1.7
PE7: U1.38 XP1.7 | length 55.9
  Top Layer w0.2: v1(57.25,34.75) 57.5,34.5 57.5,34.368 57.446,34.315 57.6,34.161 U1.38
  Bottom Layer w0.2: XP1.7 6.997,31.292 17.797,31.292 20.464,33.959 57.091,33.959 57.5,34.368 57.5,34.5 v1(57.25,34.75)
PE8: U1.39 XP1.8 | length 53.1
  Top Layer w0.2: v1(58.1,30.592) U1.39
  Bottom Layer w0.2: XP1.8 9.015,30.77 54.457,30.77 54.877,30.35 55.623,30.35 55.865,30.592 56.135,30.592 56.377,30.35 57.123,30.35 57.365,30.592 v1(58.1,30.592)
PE9: U1.40 XP1.9 | length 56.7
  Top Layer w0.2: v1(52.087,35.966) 52.306,36.185 56.11,36.185 56.97,35.325 57.706,35.325 58.075,34.956 58.075,34.286 58.6,33.761 U1.40
  Bottom Layer w0.2: XP1.9 6.99,33.825 14.894,33.825 17.32,36.25 31.848,36.25 32.133,35.966 v1(52.087,35.966)
PE10: U1.41 XP1.10 | length 54.6
  Top Layer w0.2: v1(57.269,36.245) 58.4,35.114 58.4,34.733 59.1,34.033 U1.41
  Bottom Layer w0.2: XP1.10 17.896,32.585 20.486,35.175 22.953,35.175 23.102,35.026 56.101,35.026 56.431,35.356 56.431,35.408 v1(57.269,36.245)
PE11: U1.42 XP1.11 | length 65.5
  Top Layer w0.2: v1(59.58,29.844) 60.088,30.352 60.088,30.849 59.925,31.012 59.925,31.312 59.6,31.637 U1.42
  Bottom Layer w0.2: XP1.11 4.767,34.142 4.767,29.514 5.224,29.057 50.82,29.057 52.208,30.445 54.322,30.445 54.923,29.844 v1(59.58,29.844)
PE12: U1.43 XP1.12 | length 59.8
  Top Layer w0.2: U1.43 60.1,33.959 60.481,34.34 62.095,34.34 62.25,34.495 v1(62.25,34.75)
  Bottom Layer w0.2: XP1.12 10.366,37.201 59.234,37.201 62.095,34.34 62.25,34.495 v1(62.25,34.75)
PE13: U1.44 XP1.13 | length 79.5
  Top Layer w0.2: v1(60.5,31.25) 60.5,31.642 60.418,31.724 60.6,31.906 U1.44
  Bottom Layer w0.2: XP1.13 7.307,39.222 7.307,40.944 7.561,41.198 11.015,41.198 14.165,38.048 66.336,38.048 67.242,37.143 67.242,33.061 65.905,31.724 60.418,31.724 60.5,31.642 v1(60.5,31.25)
PE14: U1.45 XP1.14 | length 72.7
  Top Layer w0.2: v1(61.1,29.59) U1.45
  Bottom Layer w0.2: XP1.14 7.022,36.397 4.97,36.397 4.437,35.864 4.437,29.26 4.995,28.701 51.466,28.701 52.885,30.12 54.188,30.12 55.058,29.25 60.759,29.25 v1(61.1,29.59)
PE15: U1.46 XP1.15 | length 86.4
  Top Layer w0.2: v1(4,21.5) 4.17,21.5 4.437,21.767 4.437,38.892 XP1.15 ; U1.46 61.6,30.567 v1(62.095,30.073)
  Bottom Layer w0.2: v1(4,21.5) 4.17,21.5 4.437,21.767 4.767,21.437 14.546,21.437 21.353,28.244 52.35,28.244 52.858,28.752 52.858,29.514 53.139,29.795 54.017,29.795 54.888,28.925 62.013,28.925 62.095,29.006 v1(62.095,30.073)
pads on no net: DA1.9 DD1.6 DD1.10 U1.2 U1.3 U1.4 U1.5 U1.7 U1.8 U1.9 U1.14 U1.15 U1.17 U1.23 U1.26 U1.35 U1.36 U1.37 U1.49 U1.59 U1.60 U1.63 U1.64 U1.67 U1.68 U1.69 U1.70 U1.71 U1.72 U1.73 U1.76 U1.77 U1.84 U1.87 U1.89 U1.90 U1.91 U1.95 U1.96 U1.97 U1.98 VT1. VT2. X1. X1.0 X1.7 X1.8 XP1.24 XP1.28 XP1.29 XP1.30 XP1.31 XP1.32 XP2.1 XP2.2 XP2.3 XP2.4 XP2.5 XP2.6 XP2.7 XP2.8 XP2.9 XP2.10 XP2.11 XP2.12 XP2.13 XP2.14 XP2.15 XP2.16 XP2.17 XP2.18 XP2.19 XP2.20 XP2.21 XP2.22 XP2.23 XP2.24 XP2.25 XP2.26 XP2.27 XP2.28 XP2.29 XP2.30 XP2.31 XP2.32 XP2.33 XP2.34 XS1.4

## Keep-outs
Keep-Out Layer:
  the board outline again, w0.2

## Dimensions
0,80 to 0,0 on Size
0,80 to 100,80 on Size

## Text inside footprints (layer, text, board x,y; h text height)
GB1: Top Overlay "+" at 39.07,59.905 h2